# Altium PCB Final_MCU.PcbDoc (part 2 of 2)
Units mil, origin at the board's own origin, x right, y up, seen from the top; angles counter-clockwise.
Board outline 6000 x 4000 mil, 2 copper layers (Top Layer, Bottom Layer); 47 components, 30 nets, 197 pads, 0 vias.
Unrouted connection lines stored in the file: 115.
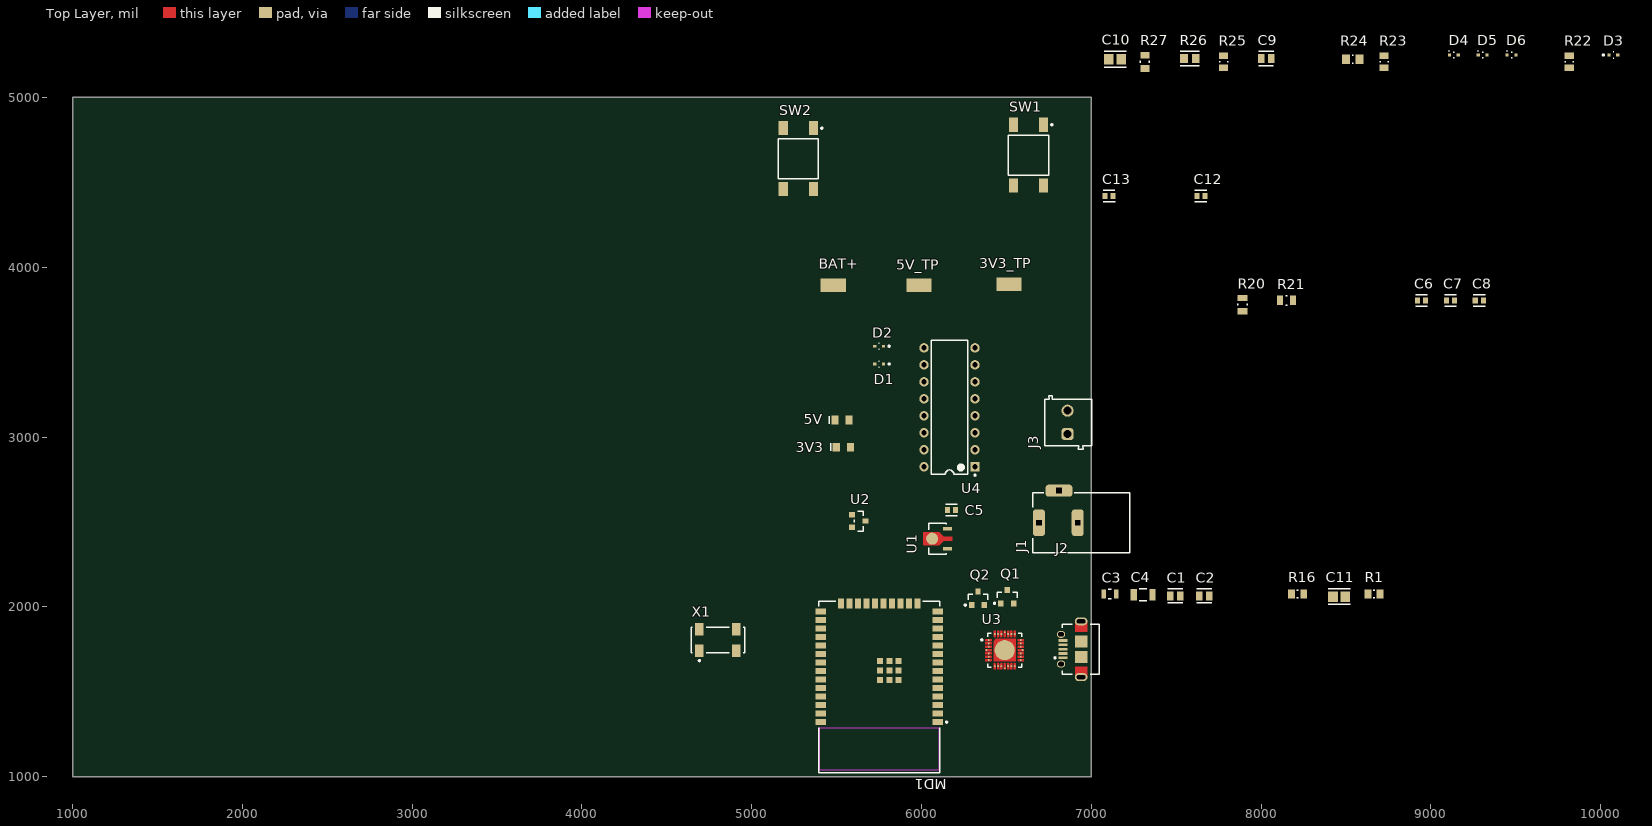
[diagram p0: Top Layer view]

## Part data (continued)
R24: library part CMP-2100-03671-1, "Chip Resistor, 1 KOhm, +/- 1%, 125 mW, -55 to 155 degC, 0805 (2012 Metric), RoHS, Tape and Reel", Case Code (Imperial)=0805, Case Code (Metric)=2012, Manufacturer=Yageo, Max Operating Temperature=155degC, Max Power Dissipation=125mW, Min Operating Temperature=-55degC, Package Description="2-Pin Surface Mounted Device, Body 2 x 1.25 mm", Package Height=0.5mm, Package Length=2mm, Package Quantity=1, Package Shape=Rectangular, Package Style=SMTMeter, Package Width=1.25mm, Rated Temperature=70°C, Resistance=1KOhm, Resistor Type="FIXED RESISTOR", Supplier Part Number=311-1.00KCRCT-ND, Temperature Coefficient=100ppm/degreesC, Tolerance=1%, Voltage Rating=150V, Additional Feature="LASER TRIMMABLE", Case/Package=0805, Category="Chip SMD Resistors", ComponentLink1Description=https://datasheet.ciiva.com:443/pdfs/VipMasterIC/IC/YAGO/YAGO-S-A0008145938/YAGO-S-A0008145938-1.pdf?src-supplier=IHS+Markit, ComponentLink1URL=https://datasheet.ciiva.com:443/pdfs/VipMasterIC/IC/YAGO/YAGO-S-A0008145938/YAGO-S-A0008145938-1.pdf?src-supplier=IHS+Markit, ComponentLink2Description=https://datasheet.ciiva.com/7941/1686128-7941719.pdf?src-supplier=Element14, ComponentLink2URL=https://datasheet.ciiva.com/7941/1686128-7941719.pdf?src-supplier=Element14, ComponentLink3Description=https://datasheet.ciiva.com/46385/444164-46385020.pdf?src-supplier=Element14, ComponentLink3URL=https://datasheet.ciiva.com/46385/444164-46385020.pdf?src-supplier=Element14, ComponentLink4Description=https://datasheet.ciiva.com/2456/pyu-r-int-thick-7-2456976.pdf?src-supplier=Digikey, ComponentLink4URL=https://datasheet.ciiva.com/2456/pyu-r-int-thick-7-2456976.pdf?src-supplier=Digikey, ComponentLink5Description=https://datasheet.ciiva.com/2456/pyu-r-int-thick-7-2456977.pdf?src-supplier=Digikey, ComponentLink5URL=https://datasheet.ciiva.com/2456/pyu-r-int-thick-7-2456977.pdf?src-supplier=Digikey, ComponentLink6Description=https://datasheet.ciiva.com/2456/pyu-r-int-thick-7-2456975.pdf?src-supplier=Digikey, ComponentLink6URL=https://datasheet.ciiva.com/2456/pyu-r-int-thick-7-2456975.pdf?src-supplier=Digikey, ComponentLink7Description=https://datasheet.ciiva.com/16850/rc0805-16850409.pdf?src-supplier=Future+Electronics, ComponentLink7URL=https://datasheet.ciiva.com/16850/rc0805-16850409.pdf?src-supplier=Future+Electronics, Composition=ThickFilm, Construction=Chip, Datasheet URL=http://www.yageo.com/NewPortal/yageodocoutput?fileName=/pdf/R-Chip/PYu-RC_Group_51_RoHS_L_5.pdf, Datasheet Version="Rev. 5, 10/2016", Depth=1.25mm, Height=0.024inch, JESD-609 Code=e3, Lead Free=LeadFree, Length=0.079inch, Manufacturer Part Number=RC0805FR-071KL, Manufacturer URL=http://www.yageo.com/, Military Standard=Not, Mounting Technology="Surface Mount", Number of Pins=2, Number of Terminations=2, Package Reference=0805, Packaging=TapeandReel, Pins=2, Power=125mW, Power Rating=125mW, Pricing="1=0.1, 10=0.025, 50=0.016, 100=0.0133, 500=0.00912, 1000=0.00787 (USD)", REACH SVHC=Unknown, Reach SVHC Compliant=Yes, RoHS=Yes, RoHS Compliant=Yes, RoHSCompliant=true, Stock=3362703, Supplier=Digikey, Technology="METAL GLAZE/THICK FILM", Terminal Finish=Nickel, Termination=SMD/SMT, Voltage Rating (DC)=150V, Width=0.049inch, Working Voltage=150V
R26: library part CMP-26527-001411-1, "22.1kΩ ±1% 0.125W 0805 Thick Film Chip Resistor AEC-Q200 compliant", Case Code (Imperial)=0805, Case Code (Metric)=2012, Manufacturer="Stackpole Electronics", Max Operating Temperature=155°C, Max Power Dissipation=125mW, Min Operating Temperature=-55°C, Package Height=0.5mm, Package Length=2mm, Package Shape=Rectangular, Package Style=SMTMeter, Package Width=1.25mm, Rated Temperature=70°C, Resistance=22.1kR, Resistor Type="Thick Film", Supplier Part Number=RMCF0805FT22K1CT-ND, Temperature Coefficient=100ppm/°C, Tolerance=1%, Working Voltage=150V, Case/Package=0805, Category="Chip SMD Resistors", ComponentLink1Description=https://datasheet.ciiva.com:443/pdfs/VipMasterIC/IC/SEIE/SEIE-S-A0009541969/SEIE-S-A0009541969-1.pdf?src-supplier=IHS+Markit, ComponentLink1URL=https://datasheet.ciiva.com:443/pdfs/VipMasterIC/IC/SEIE/SEIE-S-A0009541969/SEIE-S-A0009541969-1.pdf?src-supplier=IHS+Markit, ComponentLink2Description=https://datasheet.ciiva.com/15193/getdatasheetpartid-409700-15193558.pdf?src-supplier=Verical, ComponentLink2URL=https://datasheet.ciiva.com/15193/getdatasheetpartid-409700-15193558.pdf?src-supplier=Verical, Construction=Rectangular, Contact Plating=Tin, Depth=1.25mm, Features="Automotive AEC-Q200", Height=0.026inch, JESD-609 Code=e3, Lead Free="Lead Free", Length=0.079inch, Manufacturer Part Number=RMCF0805FT22K1, Military Standard=Not, Mount="Surface Mount", Mounting Technology="Surface Mount", Number of Terminations=2, Packaging="Tape and Reel", Pins=2, Power=125mW, Power Rating=125mW, Pricing="1=0.1, 10=0.02, 50=0.0124, 100=0.0103, 500=0.007, 1000=0.00601 (USD)", Radiation Hardening=No, Reach SVHC Compliant=Yes, Reference Standard=AEC-Q200, RoHS=Yes, RoHS Compliant=Yes, Series=RMCF, Size Code=0805, Stock=745768, Supplier=Digikey, Technology="METAL GLAZE/THICK FILM", Terminal Finish=Nickel, Termination=Wraparound, Width=0.049inch
R27: library part CMP-03211-007667-1, "SMD Chip Resistor, Thin Film, 47.5KΩ, 100 V, 0805 [2012 Metric], 100 mW, 0.1%, RN73 Series", Case/Package=0805, Manufacturer="TE Connectivity", Manufacturer Series=RN73, Max Operating Temperature=125°C, Min Operating Temperature=-55°C, Package=RN732A, Package Shape=Rectangular, Power=100mW, Power Rating=0.1W, Rated Temperature=70°C, Resistance=47.5KΩ, Resistor Type="FIXED RESISTOR", Supplier Part Number=A119902CT-ND, Temperature="-55°C to 155°C", Temperature Coefficient=10ppm/°C, Temperature Range High=155°C, Tolerance=0.1%, Voltage Rating=100V, Additional Feature=PRECISION, Automotive=No, Category=Res, ComponentLink1Description=https://datasheet.ciiva.com:443/pdfs/VipMasterIC/IC/TYEC/TYECS00448/TYECS00448-1.pdf?src-supplier=IHS+Markit, ComponentLink1URL=https://datasheet.ciiva.com:443/pdfs/VipMasterIC/IC/TYEC/TYECS00448/TYECS00448-1.pdf?src-supplier=IHS+Markit, ComponentLink2Description=Datasheet, ComponentLink2URL=https://www.te.com/commerce/DocumentDelivery/DDEController?Action=showdoc&DocId=Data+Sheet%7F1773270%7FP%7Fpdf%7FEnglish%7FENG_DS_1773270_P.pdf%7F1676162-2, ComponentLink3Description=https://datasheet.ciiva.com/2547/eng-ds-1773270-m-2547934.pdf?src-supplier=Digikey, ComponentLink3URL=https://datasheet.ciiva.com/2547/eng-ds-1773270-m-2547934.pdf?src-supplier=Digikey, Composition="Thin Film", Device Class L1="Passive Components", Device Class L2=Resistors, Device Class L3="Chip SMD Resistors", Height=0.65mm, Ipc Land Pattern Name=RESC200125X55, Lead Free=Yes, Manufacturer Part Number=RN73C2A47K5BTD, Mounting Technology="Surface Mount", Octopart=https://octopart.com/rn73c2a47k5btd-te+connectivity-22736876, octopart_url=https://octopart.com/rn73c2a47k5btd-te+connectivity-22736876, Packaging="5000 Reel", Pins=2, Pricing="1=0.73, 10=0.521, 50=0.3986, 100=0.3526, 500=0.26204, 1000=0.22944 (USD)", RoHS=TRUE, RoHS Compliant=Yes, Series=RN73, Stock=2760, Supplier=Digikey, Technology="THIN FILM", Temperature Range Low=-55°C, Termination=Wraparound, Working Voltage=100V
SW1 SW2: library part CMP-2000-07486-1, "Micro Miniature Push Button Switch FSM JSM, 50 mA, -35 to 85 degC, 4-Pin SMD, RoHS, Tape and Reel", Capacitance=0f, Case\/Package=SMD/SMT, Contact Current Rating=50mA, Contact DC Max Rating R Load=.05A@12VDC, Contact Resistance=100mOhm, Contact Voltage(DC)-Max=12V, Manufacturer="TE Connectivity", Max Operating Temperature=85degC, Min Operating Temperature=-35degC, Operating Force=160gf, Operating Force-Max=2.06N, Package Description="4-Pin Surface Mount Device, Body 6 x 6 mm, Pitch 4.5 mm", Package Quantity=1200, Supplier Part Number=450-1759-1-ND, Voltage Rating (DC)=24V, Actuator Length=0.055inch, Actuator Material=Polyamide, Body Breadth=6inch, Body Height=3.6mm, Body Length or Diameter=6mm, Category="Pushbutton Switches", Circuit Configuration=1X1, ComponentLink1Description=https://datasheet.ciiva.com:443/pdfs/VipMasterIC/IC/TYEL/TYEL-S-A0008743874/TYEL-S-A0008712894-1.pdf?src-supplier=IHS+Markit, ComponentLink1URL=https://datasheet.ciiva.com:443/pdfs/VipMasterIC/IC/TYEL/TYEL-S-A0008743874/TYEL-S-A0008712894-1.pdf?src-supplier=IHS+Markit, ComponentLink2Description=https://datasheet.ciiva.com/5801/eng-cd-2-1437565-7-u2-5801346.pdf?src-supplier=Farnell, ComponentLink2URL=https://datasheet.ciiva.com/5801/eng-cd-2-1437565-7-u2-5801346.pdf?src-supplier=Farnell, ComponentLink3Description=https://datasheet.ciiva.com/23765/1486934-23765878.pdf?src-supplier=Newark, ComponentLink3URL=https://datasheet.ciiva.com/23765/1486934-23765878.pdf?src-supplier=Newark, ComponentLink4Description=https://datasheet.ciiva.com/1530/1683375-1530944.pdf?src-supplier=Element14, ComponentLink4URL=https://datasheet.ciiva.com/1530/1683375-1530944.pdf?src-supplier=Element14, ComponentLink5Description=https://datasheet.ciiva.com/16320/eng-cs-1308111-1-switches-core-program-catalog-0308-16320065.pdf?src-supplier=Future+Electronics, ComponentLink5URL=https://datasheet.ciiva.com/16320/eng-cs-1308111-1-switches-core-program-catalog-0308-16320065.pdf?src-supplier=Future+Electronics, ComponentLink6Description=https://datasheet.ciiva.com/7638/921681-7638037.pdf?src-supplier=Element14, ComponentLink6URL=https://datasheet.ciiva.com/7638/921681-7638037.pdf?src-supplier=Element14, Contact Current(DC)-Max=50mA, Contact Material=CopperAlloy, Contact Plating=Silver, Current Rating=50mA, Datasheet URL=http://www.te.com/commerce/DocumentDelivery/DDEController?Action=showdoc&DocId=Customer+Drawing%7F2-1437565-7%7FV%7Fpdf%7FEnglish%7FENG_CD_2-1437565-7_V.pdf%7F4-1437565-2, Datasheet Version="Rev. V, 02/2015", Electrical Life=100000Cycles, Illumination Type=Illuminated, JESD-609 Code=e4, Manufacturer Part Number=FSM4JSMATR, Manufacturer URL=http://www.te.com/, Max Voltage Rating (DC)=12V, Mechanical Life=100000Cycles, Mount=SurfaceMount, Mounting Technology=SurfaceMount, Number of Switches=1, Orientation=Straight, Package Reference=FSM4JSMATR, Packaging=TapeandReel, Pricing="1=0.36, 10=0.351, 25=0.33, 100=0.2866, 250=0.26, 500=0.24188 (USD)", REACH SVHC=Unknown, Reach SVHC Compliant=Yes, RoHS=Yes, RoHS Compliant=Yes, RoHSCompliant=true, Stock=69097, Supplier=Digikey, Switch Action=MOMENTARY-TACTILE, Switch Function=SPST, Switch Travel=0.25mm, Switch Type=Keypad, Terminal Finish=Silver, Termination=GullWing, Throw Configuration=SPST
U1: library part CMP-0244-00407-2, "IC REG LINEAR 5V 100MA SOT89-3", Case/Package=SOT-89, Dropout Voltage=1.7V, Input Voltage Absolute-Max=30V, Manufacturer=STMicroelectronics, Max Operating Temperature=125°C, Max Output Current=100mA, Max Supply Voltage=20V, Min Input Voltage=7V, Min Operating Temperature=0°C, Min Output Voltage=5V, Output Current1-Max=70mA, Output Voltage1-Max=5.25V, Output Voltage1-Min=4.75V, Output Voltage Accuracy=4%, Package Body Material=Plastic, Package Equivalence Code=TO-243, Package Quantity=1, Package Shape=Rectangular, Package Style="SMALL OUTLINEMeter", Peak Reflow Temperature (Cel)=260°C, Power Supply Rejection Ratio (PSRR)=49dB, Quiescent Current=6mA, Supplier Part Number=497-1183-1-ND, Time @ Peak Reflow Temperature-Max (s)=30s, Voltage Tolerance-Max=5%, Accuracy=4%, Adjustability=FIXED, Category="Voltage Regulators - Linear", Channels=1, ComponentLink1Description=https://datasheet.ciiva.com:443/pdfs/VipMasterIC/IC/SGST/SGST-S-A0002857926/SGST-S-A0002857926-1.pdf?src-supplier=IHS+Markit, ComponentLink1URL=https://datasheet.ciiva.com:443/pdfs/VipMasterIC/IC/SGST/SGST-S-A0002857926/SGST-S-A0002857926-1.pdf?src-supplier=IHS+Markit, ComponentLink2Description=https://datasheet.ciiva.com/1511/1868798-1511940.pdf?src-supplier=Element14, ComponentLink2URL=https://datasheet.ciiva.com/1511/1868798-1511940.pdf?src-supplier=Element14, ComponentLink3Description=https://datasheet.ciiva.com/22710/1868798-22710940.pdf?src-supplier=Element14, ComponentLink3URL=https://datasheet.ciiva.com/22710/1868798-22710940.pdf?src-supplier=Element14, ComponentLink4Description=https://datasheet.ciiva.com/7992/1868798-7992600.pdf?src-supplier=Element14, ComponentLink4URL=https://datasheet.ciiva.com/7992/1868798-7992600.pdf?src-supplier=Element14, ComponentLink5Description=https://datasheet.ciiva.com/2041/cd00000446-2041791.pdf?src-supplier=Digikey, ComponentLink5URL=https://datasheet.ciiva.com/2041/cd00000446-2041791.pdf?src-supplier=Digikey, ComponentLink6Description=https://datasheet.ciiva.com/2041/cd00000446-2041790.pdf?src-supplier=Digikey, ComponentLink6URL=https://datasheet.ciiva.com/2041/cd00000446-2041790.pdf?src-supplier=Digikey, ComponentLink7Description=https://datasheet.ciiva.com/2041/cd00000446-2041792.pdf?src-supplier=Digikey, ComponentLink7URL=https://datasheet.ciiva.com/2041/cd00000446-2041792.pdf?src-supplier=Digikey, ComponentLink8Description=https://datasheet.ciiva.com/4882/cd00000446-355303-4882429.pdf?src-supplier=Mouser, ComponentLink8URL=https://datasheet.ciiva.com/4882/cd00000446-355303-4882429.pdf?src-supplier=Mouser, ComponentLink9Description=https://datasheet.ciiva.com/16393/cd00000446-16393708.pdf?src-supplier=Future+Electronics, ComponentLink9URL=https://datasheet.ciiva.com/16393/cd00000446-16393708.pdf?src-supplier=Future+Electronics, Contact Plating=Tin, Dropout Voltage1-Nom=1.7V, Height=1.6mm, Height - Seated (Max)=1.6mm, JESD-30 Code=R-PSSO-F3, JESD-609 Code=e3, Lead Free="Lead Free", Length=4.6mm, Line Regulation-Max=0.15%, Load Regulation-Max=0.06%, Manufacturer Part Number=L78L05ACUTR, Max Input Voltage=30V, Moisture Sensitivity Level=1, Mount="Surface Mount", Nominal Output Voltage=5V, Number Of Outputs=1, Number of Pins=3, Number of Regulators=1, Operating Temperature, TJ-Max=125°C, Operating Temperature, TJ-Min=0°C, Output Current=100mA, Output Type=Fixed, Output Voltage=5V, Output Voltage1-Nom=5V, Packaging="Tape and Reel", Pins=3, Polarity=Positive, Pricing="1=0.54, 10=0.464, 25=0.4328, 100=0.3461, 250=0.32144, 500=0.27198, 1000=0.21016 (USD)", Qualification Status="Not Qualified", Radiation Hardening=No, REACH SVHC="No SVHC", Reach SVHC Compliant=Yes, Regulator Type="FIXED POSITIVE SINGLE OUTPUT STANDARD REGULATOR", RoHS=Yes, RoHS Compliant=Yes, Stock=92237, Supplier=Digikey, Surface Mount=Yes, Technology=BIPOLAR, Terminal Finish=Tin, Terminal Form=Flat, Terminal Pitch=1.495mm, Terminal Position=SINGLE, Weight=0.004603oz, Width=2.6mm
U2: library part CMP-12756-000008-1, "IC REG LINEAR 3.3V 150MA SOT23", Case/Package=TSSOP, Dropout Voltage=300mV, Input Voltage Absolute-Max=6.5V, Manufacturer="Diodes Inc.", Max Junction Temp=+85°C, Max Supply Voltage=6V, Min Input Voltage=2V, Nominal Supply Current=25uA, Operating Temperature, TJ-Max=85°C, Operating Temperature, TJ-Min=-40°C, Output Current=150mA, Output Current1-Max=100mA, Output Voltage=3.3V, Output Voltage1-Max=3.366V, Output Voltage1-Min=3.234V, Package=SOT23, Package Body Material=Plastic, Package Equivalence Code=TO-236, Package Shape=Rectangular, Package Style="SMALL OUTLINE, THIN PROFILE, SHRINK PITCHMeter", Peak Reflow Temperature (Cel)=260°C, Supplier Part Number=AP2120N-3.3TRG1DICT-ND, Temperature="-40°C to +85°C", Time @ Peak Reflow Temperature-Max (s)=30s, Voltage Tolerance-Max=2%, Accuracy Percentage=2%, Adjustability=FIXED, Automotive=No, Category=IC, Channels=1, ComponentLink1Description=https://datasheet.ciiva.com:443/pdfs/VipMasterIC/IC/DIOD/DIOD-S-A0008513436/DIOD-S-A0008513436-1.pdf?src-supplier=IHS+Markit, ComponentLink1URL=https://datasheet.ciiva.com:443/pdfs/VipMasterIC/IC/DIOD/DIOD-S-A0008513436/DIOD-S-A0008513436-1.pdf?src-supplier=IHS+Markit, ComponentLink2Description=Datasheet, ComponentLink2URL=https://www.diodes.com/assets/Package-Files/SOT23.pdf, ComponentLink3Description=https://datasheet.ciiva.com/29569/ap2120-29569979.pdf?src-supplier=Digikey, ComponentLink3URL=https://datasheet.ciiva.com/29569/ap2120-29569979.pdf?src-supplier=Digikey, ComponentLink4Description=https://datasheet.ciiva.com/29569/ap2120-29569977.pdf?src-supplier=Digikey, ComponentLink4URL=https://datasheet.ciiva.com/29569/ap2120-29569977.pdf?src-supplier=Digikey, ComponentLink5Description=https://datasheet.ciiva.com/30016/ap2120-30016809.pdf?src-supplier=Avnet, ComponentLink5URL=https://datasheet.ciiva.com/30016/ap2120-30016809.pdf?src-supplier=Avnet, ComponentLink6Description=https://datasheet.ciiva.com/29569/ap2120-29569978.pdf?src-supplier=Digikey, ComponentLink6URL=https://datasheet.ciiva.com/29569/ap2120-29569978.pdf?src-supplier=Digikey, Device Class L1="Integrated Circuits (ICs)", Device Class L2="Power Management ICs", Device Class L3="Voltage Regulators - Linear", Digikey Description="IC REG LINEAR 3.3V 150MA SOT23", Dropout Voltage1-Max=300mV, Dropout Voltage1-Nom=300mV, Footprint Url=https://www.diodes.com/assets/Package-Files/SOT23.pdf, Height=1.1mm, Height - Seated (Max)=1.2mm, Ipc Land Pattern Name=SOT92P240X102-3, JESD-30 Code=R-PDSO-G3, JESD-609 Code=e3, Lead Free=Yes, Length=2.9mm, Line Regulation-Max=0.016%, Load Regulation-Max=0.04%, Manufacturer Part Number=AP2120N-3.3TRG1, Min Supply Voltage=2V, Moisture Sensitivity Level=3, Mouser Description="AP2120 Series 3.3 V 0.15 A Surface Mount CMOS LDO Regulator - SOT23", Number Of Outputs=1, Octopart=https://octopart.com/ap2120n-3.3trg1-diodes+inc.-30954573, Output Type=Fixed, Output Voltage1-Nom=3.3V, Packaging="Tape and Reel", Pins=3, Pricing="1=0.38, 10=0.281, 25=0.246, 100=0.1592, 250=0.1318, 500=0.10544, 1000=0.08084 (USD)", Qualification Status="Not Qualified", Reach SVHC Compliant=Yes, Regulator Type="FIXED POSITIVE SINGLE OUTPUT LDO REGULATOR", RoHS=TRUE, RoHS Compliant=Yes, Standoff Height=0.013mm, Stock=949628, Supplier=Digikey, Surface Mount=Yes, Technology=CMOS, Temperature Range High=+85°C, Temperature Range Low=-40°C, Terminal Finish=Tin, Terminal Form="Gull Wing", Terminal Pitch=0.95mm, Terminal Position=DUAL, Width=1.3mm
U3: library part CMP-08093-000007-1, "IC USB TO UART BRIDGE QFN28"
U4: library part CMP-2000-06524-1, "Push-Pull Four Channel Driver with Diode, 4.5 to 36 V, -40 to 150 degC, 16-Pin PDIP, RoHS, Tube", Current - Output / Channel=600mA, Current - Peak Output=1.2A, Manufacturer=STMicroelectronics, On-State Resistance=-, Operating Temperature=-40°C~150°C, Package / Case="16-DIP(0.300\",7.62mm)", Package Description="16-Pin Thru-Hole Dual-In-Line, Body 20 x 6.85 mm, Pitch 2.54 mm", Package Reference=DIP-16, Standard Package=25, Supplier Device Package=16-PowerDIP, Voltage - Supply=4.5V~36V, Category=IntegratedCircuits(ICs), Datasheet URL=http://www.st.com/st-web-ui/static/active/en/resource/technical/document/datasheet/CD00000059.pdf, Datasheet Version=07/2003, Dynamic Catalog=HalfBridge, Family=PMIC-MOSFET,BridgeDrivers-InternalSwitch, Input Type=Non-Inverting, Manufacturer URL=http://www.st.com/, Mounting Technology=ThroughHole, Mounting Type=ThroughHole, Number Of Outputs=4, Other Names=497-2936-5, Other Related Documents=L293DViewAllSpecifications, Packaging=Tube, PartNumber=L293D, Series=-, Type=HalfBridge
X1: library part CMP-2000-05036-1, "Low Frequency Crystal, 32.768 KHz, 6 pF, +/- 20 ppm, -40 to 85 degC, 4-Pin SMD, RoHS, Tape and Reel", Case Height=2.5mm, Case Length=8mm, Case Width=3.8mm, Frequency=32.768kHz, Load Capacitance=6pF, Manufacturer=Abracon, Operating Temperature Range=-40Cto+85C, Package / Case=8mmx3.8mm, Package Description="4-Pin Surface Mount Device, Body 8 x 3.8 mm, Pitch 5.5 mm", Package Reference=ABS25, Tolerance=20PPM, Brand=ABRACON, Datasheet URL=https://datasheet.ciiva.com/854/abs25-854528.pdf, Datasheet Version=Jun-17, Dimensions=3.8mmWx8mmLx2.5mmH, ESR=50kOhms, Factory Pack Quantity=3000, Manufacturer URL=http://www.abracon.com/, Mounting Style=SMD/SMT, Packaging=Reel, Product Category=Crystals, RoHS=Details, Series=ABS25, Termination Style=SMD/SMT, Type=LowFrequencyCrystal

## Nets (pads, with @x,y where several pads share a name; then routed paths per layer and width w, separated by ;. In a path a pad name is that pad's centre, name@x,y a point inside that pad or via, vN(x,y) a via of type N, cw(c..) or ccw(c..) an arc to the next point about the centre after c; other vN are vias at no path point)
3V3: 3V3.2 3V3_TP.1 C3.1 C4.1 C8.1 C9.1 MD1.2 R1.1 R16.2 R24.2 U2.2 U3.6 U3.7
5V: 5V.2 C7.1 D1.1 D2.1 U2.3 U4.1 U4.9
5V_BAT: 5V_TP.1 C6.1 D1.2 U1.1
5V_USB: D2.2 D3.1
BAT+: BAT+.1 C5.1 J1.1 U1.3
CP_VBUS: C10.1 R26.2 R27.2 U3.8
DTR: Q2.2 R22.1 U3.28
DTR_GATE: Q1.1 R22.2
EN: C11.1 C13.1 MD1.3 Q1.3 R1.2 SW2.4
GND: C1.1 C2.1 C3.2 C4.2 C5.2 C6.2 C7.2 C8.2 C9.2 C10.2 C11.2 C12.2 C13.2 D4.1 D5.1 D6.1 J1.2 J1.3 J2.5 J2.6 J2.7 J2.8 J2.9 J2.10 J2.11 MD1.1 MD1.15 MD1.38 MD1.39 R20.2 R21.2 R25.1 R27.1 SW1.1 SW2.1 U1.2 U2.1 U3.3 U3.29 U4.4 U4.5 U4.12 U4.13
IO0: C12.1 MD1.25 Q2.3 SW1.4
IO32: C1.2 MD1.8 X1.1
IO33: C2.2 MD1.9 X1.4
MCU_PWM_B: MD1.36 U4.7
MCU_PWM_F: MD1.33 U4.2
MOTOR_NEG: J3.2 U4.6
MOTOR_POS: J3.1 U4.3
Net3V3_1: 3V3.1 R21.1
Net5V_1: 5V.1 R20.1
NetMD1_27: MD1.27 R16.1
NetR24_1: R24.1 U3.9
NetR25_2: R25.2 U3.11
RTS: Q1.2 R23.2 U3.24
RTS_GATE: Q2.1 R23.1
RXD0: MD1.35 U3.25
TXD0: MD1.34 U3.26
USB_DM: D5.2 J2.2 U3.5
USB_DP: D4.2 J2.3 U3.4
VBAT: U4.8 U4.16
VBUS: D3.2 D6.2 J2.1 R26.1
pads on no net: J2.4 MD1.4 MD1.5 MD1.6 MD1.7 MD1.10 MD1.11 MD1.12 MD1.13 MD1.14 MD1.16 MD1.17 MD1.18 MD1.19 MD1.20 MD1.21 MD1.22 MD1.23 MD1.24 MD1.26 MD1.28 MD1.29 MD1.30 MD1.31 MD1.32 MD1.37 SW1.2 SW1.3 SW2.2 SW2.3 U3.1 U3.2 U3.10 U3.12 U3.13 U3.14 U3.15 U3.16 U3.17 U3.18 U3.19 U3.20 U3.21 U3.22 U3.23 U3.27 U4.10 U4.11 U4.14 U4.15 X1.2 X1.3

## Text inside footprints (layer, text, board x,y; h text height)
J2: Mechanical 1 "PCB EDGE" at 6979.37,1974.68 h39.37 r90